# Altium PCB pcb.PcbDoc
Units mil, origin at the board's own origin, x right, y up, seen from the top; angles counter-clockwise.
Board outline 6000 x 4000 mil, 2 copper layers (Top Layer, Bottom Layer); 30 components, 39 nets, 195 pads, 11 vias.
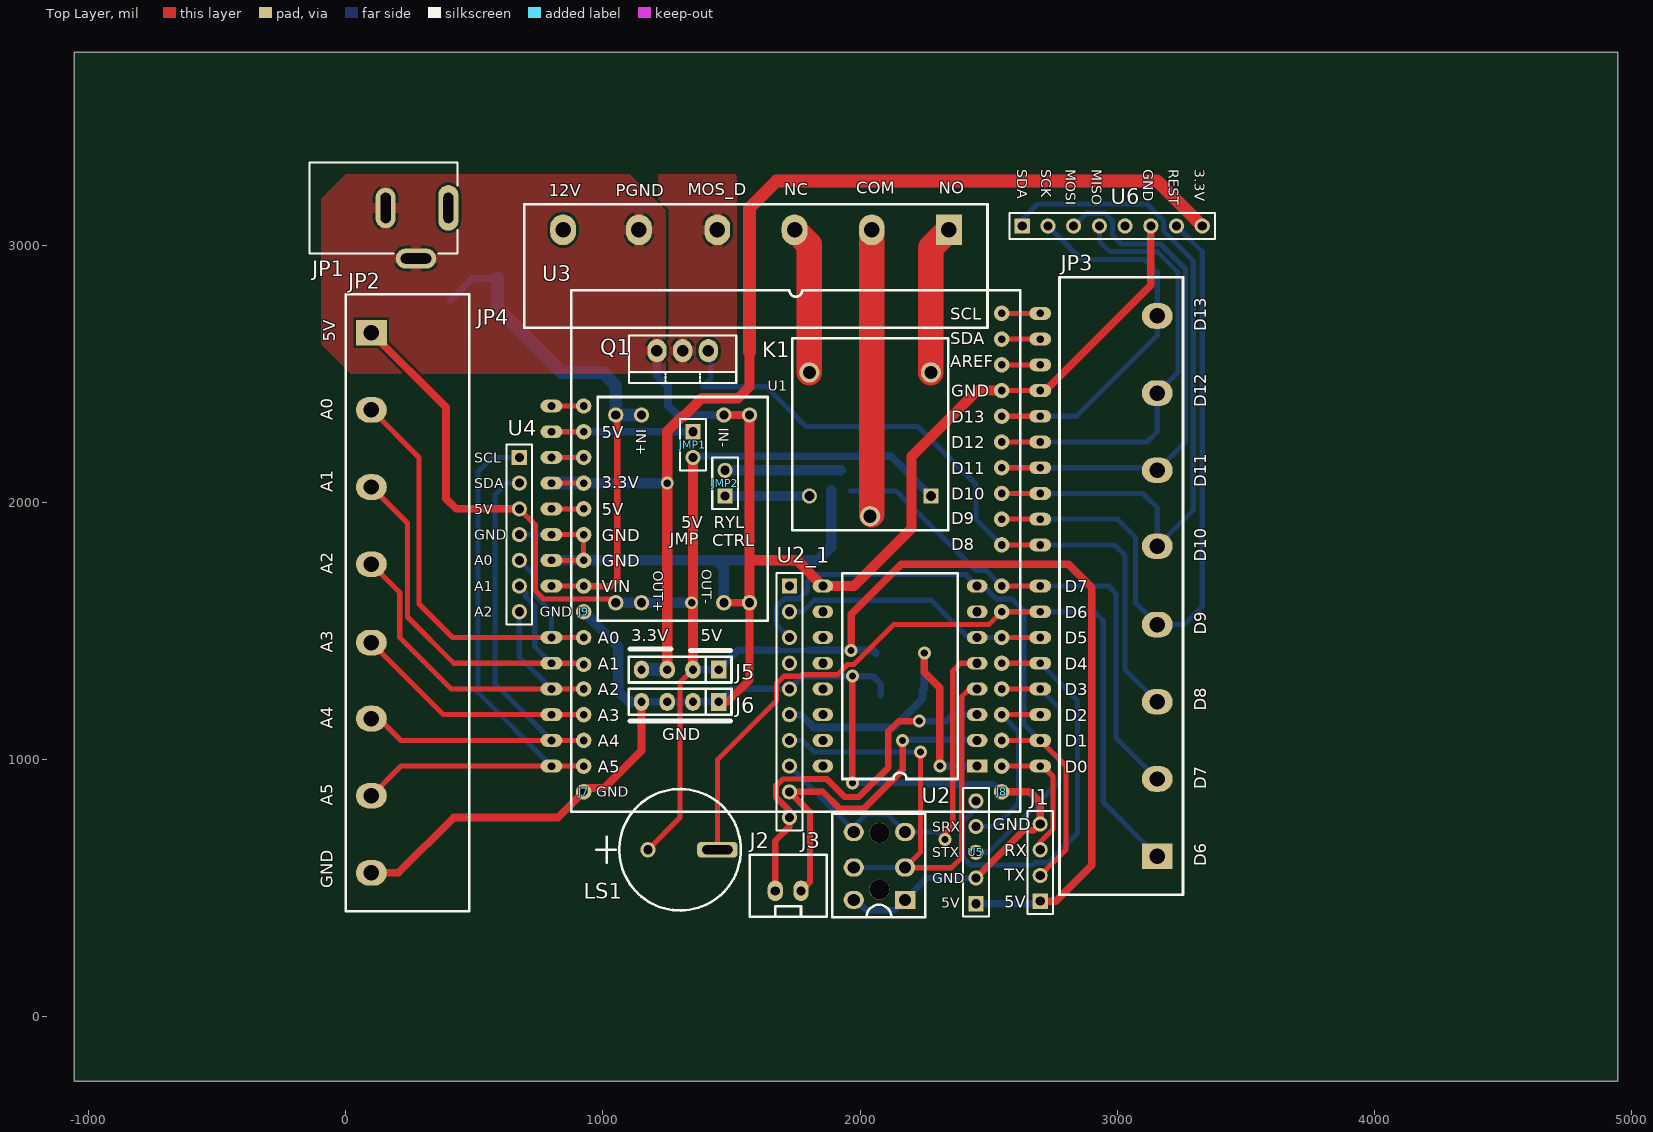
[diagram p0: Top Layer view]
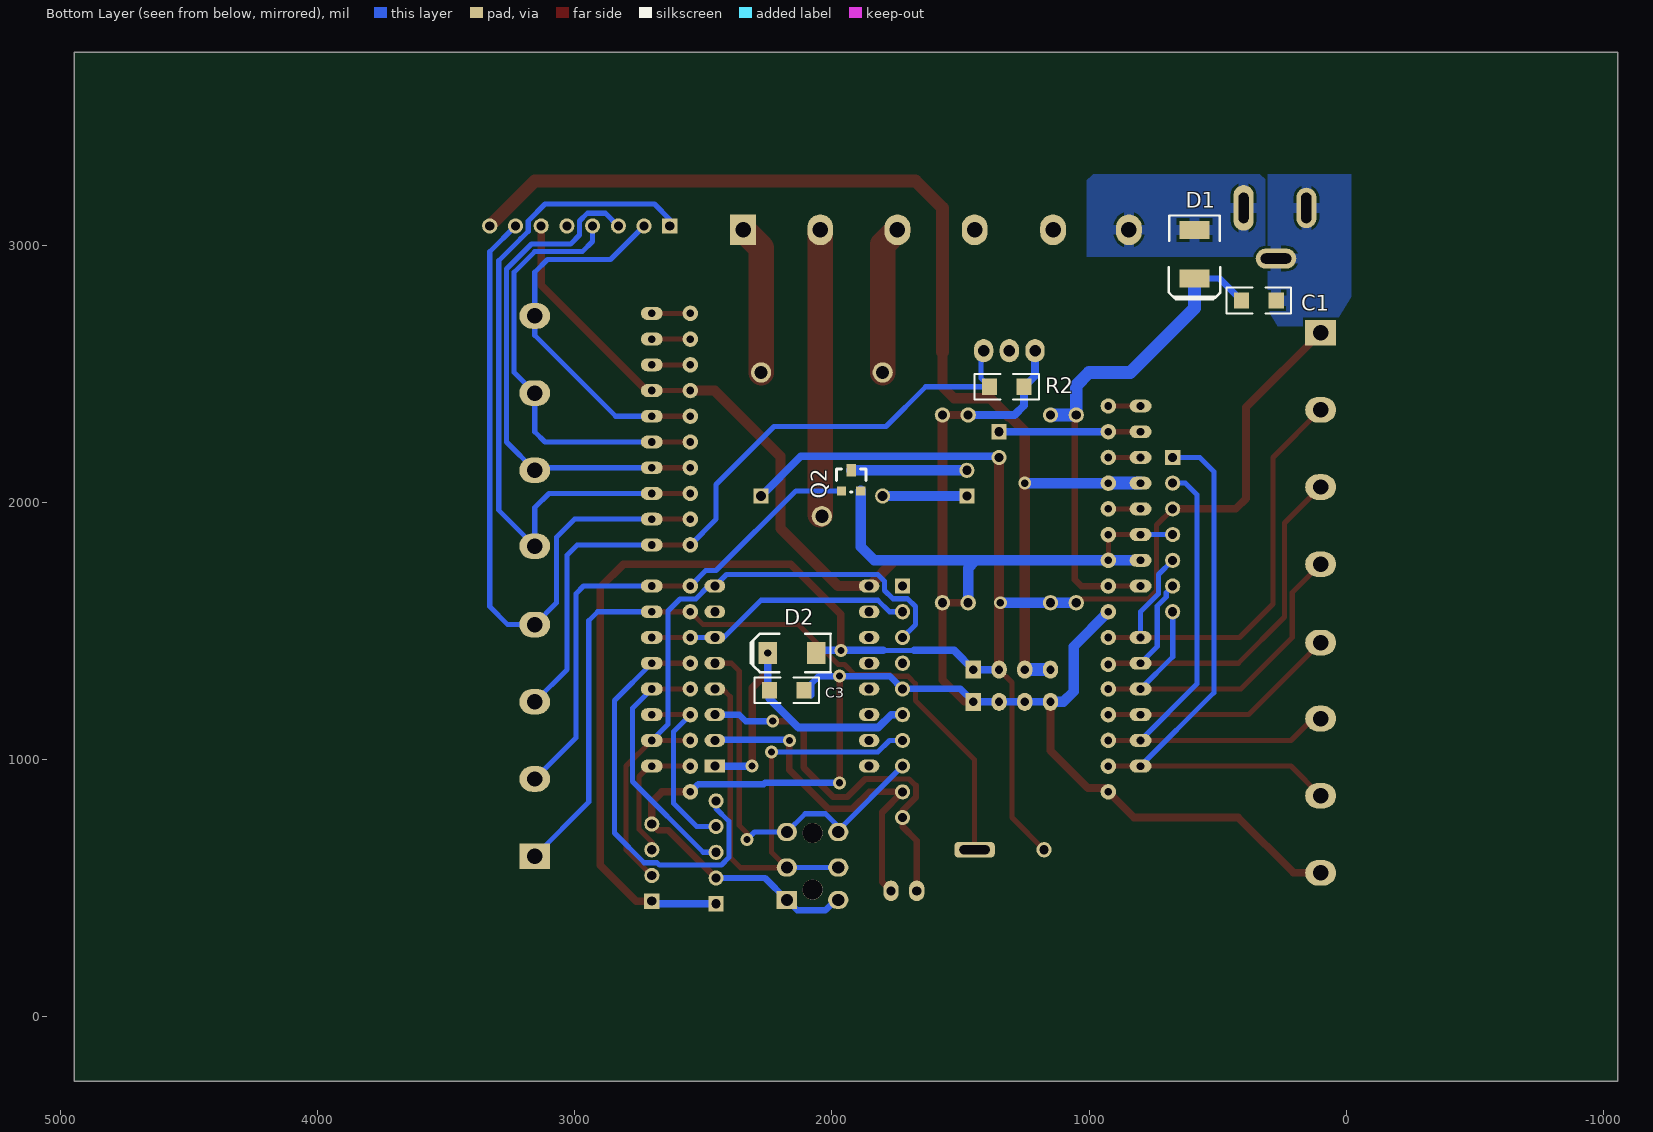
[diagram p1: Bottom Layer view, seen from below]

## Layer stack, top to bottom
Top Solder: solder mask 0.4, Solder Resist, Dk 3.5
Top Layer: signal copper 1.4
Dielectric 1: dielectric 12.6, FR-4, Dk 4.8
Bottom Layer: signal copper 1.4
Bottom Solder: solder mask 0.4, Solder Resist, Dk 3.5

## Board outline
-1055,-250 4945,-250 4945,3750 -1055,3750

## Design rules (kind name [scope] priority, off if disabled: settings)
Clearance Clearance_AC [(InNet('COM') OR InNet('NO') OR InNet('NC'))] p1: gap=30
Clearance [All] p2: gap=10
ComponentClearance ComponentClearance_1 [(InComponent('U3') OR InComponent('U1'))] p1: gap=0 collisioncheckmode=3 verticalgap=0 showdistances=TRUE
ComponentClearance [All] p2: gap=1 collisioncheckmode=3 verticalgap=1 showdistances=TRUE
HoleSize [All] p1: absolutevalues=TRUE maxlimit=200 minlimit=1 maxpercent=80.000 minpercent=20.000
PlaneConnect [All] p1: planeconnectstyle=Relief reliefexpansion=40 reliefentries=4 reliefconductorwidth=60 reliefairgap=20
PolygonConnect [All] p1: connectstyle=Relief reliefconductorwidth=40 reliefentries=4 polygonreliefangle="90 Angle" airgapwidth=10
RoutingVias [All] p1: holewidth=28 width=50 viastyle="Through Hole" minholewidth=28 minwidth=50 maxholewidth=28 maxwidth=50
SilkToSilkClearance [All] p1: silktosilkclearance=1
SilkToSolderMaskClearance [IsPad] p1: minsilkscreentomaskgap=5 clearancetoexposedcopper=TRUE
SolderMaskExpansion [All] p1: expansion=4
Width [All] p1: maxlimit=196.85 minlimit=10 preferedwidth=10
24 further rules are at their usual default settings.

## Components (designator, comment, footprint, x,y, rotation, side; value= is the part's Value field where it differs from the comment)
C1 "Cap Semi" 1206 340,2785 r0 bottom
C3 "Cap Semi" 1206 2175,1270 r0 bottom
D1 "SS24" SMB 590,2965 r270 bottom
D2 "M7" SMA 2155,1415 r0 bottom
J1 "4 HEADER" HDR1X4 2700,450 r90 top
J2 "SPK" DG1282 1570,130 r0 top
J3 "earphone_jack" PHONE-JACK 2175,455 r180 top
J5 "CON4" SIP4 1300,1350 r180 top
J6 "CON4" SIP4 1300,1225 r180 top
J7 "CON1" "ONE PIN" 925,875 r0 top
J8 "CON1" "ONE PIN" 2550,875 r0 top
J9 "CON1" "ONE PIN" 925,1575 r0 top
JMP1 "JUMPER" HDR1X2 1350,2275 r270 top
JMP2 "JUMPER" HDR1X2 1475,2025 r90 top
JP1 "PWR2.5" KLD-0202_new -140,3145 r0 top
JP2 "8 HEADER" "POWER CONN8" 100,2660 r270 top
JP3 "8 HEADER" "POWER CONN8" 3155,625 r90 top
JP4 "CON6" "POWER CONN6" 2345,3060 r180 top
K1 "RELAY-SPDT" RELAY_SPDT 2275,2025 r180 top
LS1 "Buzzer" BUZZ 1175,650 r0 top
Q1 "IRF510" TO-220 1310,2590 r180 top
Q2 "PDTC143ET" SOT23 1925,2085 r180 bottom
R2 "10k" 1206 1320,2450 r180 bottom
U1 "BuckConverter" BUCKCONVERTER 1570,2340 r270 top
U2 "MP3" MP3 2455,975 r180 top
U2_1 "SingleMP3" HDR1X10 1725,1675 r270 top
U3 "Uno_part" UNO 800,975 r0 top
U4 "ADDR_SET" HDR1X7 675,2175 r270 top
U5 "WireLess433" HDR1X5 2450,440 r90 top
U6 "RC522" HDR1X8 2630,3075 r0 top

## Footprints (in the part's own frame and the unit in brackets; to place one, negate y for a bottom-side part, rotate by r counter-clockwise, add the part's x,y. Pads: shape width x height; smd on the part's side, far side on the other; paste and mask are expansions set on the pad)
1206 [mm]
  rect 1.5x1.6 smd: 1(-1.71,0) 2(1.71,0)
  silkscreen extent -3.17,-1.27 3.17,1.27
BUCKCONVERTER [mil]
  round 60 hole 35.43: 1(0,0) 1(0,-100) 2(0,-420) 2(0,-520) 3(730,-100) 3(730,0) 4(730,-520) 4(730,-420)
  silkscreen extent -70,-590 800,70
BUZZ [mm] "6~8mm"
  round 1.5 hole 0.9: 1(0,0)
  rrect50% 4x1.524 hole 0.9 slot 3 at 0 deg: 2(6.858,0)
  silkscreen extent -5.08,-6 9.18,6
DG1282 [mil]
  oval 60x80 hole 35.43: 1(100,360) 2(200,360)
  silkscreen extent 0,260 300,500
HDR1X2 [mm] "Connector; Header; 2 Position"
  rect 1.5x1.5 hole 0.9: 1(0,0)
  round 1.5 hole 0.9: 2(2.54,0)
  silkscreen extent -1.27,-1.27 3.81,1.27
HDR1X4 [mm] "Connector; Header; 4 Position"
  rect 1.5x1.5 hole 0.9: 1(0,0)
  round 1.5 hole 0.9: 2(2.54,0) 3(5.08,0) 4(7.62,0)
  silkscreen extent -1.27,-1.27 8.89,1.27
HDR1X5 [mm] "Connector; Header; 5 Position"
  rect 1.5x1.5 hole 0.9: 1(0,0)
  round 1.5 hole 0.9: 2(2.54,0) 3(5.08,0) 4(7.62,0) 5(10.16,0)
  silkscreen extent -1.27,-1.27 11.43,1.27
HDR1X7 [mm] "Connector; Header; 7 Position"
  rect 1.5x1.5 hole 0.9: 1(0,0)
  round 1.5 hole 0.9: 2(2.54,0) 3(5.08,0) 4(7.62,0) 5(10.16,0) 6(12.7,0) 7(15.24,0)
  silkscreen extent -1.27,-1.27 16.51,1.27
HDR1X8 [mm] "Connector; Header; 8 Position"
  rect 1.5x1.5 hole 0.9: 1(0,0)
  round 1.5 hole 0.9: 2(2.54,0) 3(5.08,0) 4(7.62,0) 5(10.16,0) 6(12.7,0) 7(15.24,0) 8(17.78,0)
  silkscreen extent -1.27,-1.27 19.05,1.27
HDR1X10 [mm] "Connector; Header; 10 Position"
  rect 1.5x1.5 hole 0.9: 1(0,0)
  round 1.5 hole 0.9: 2(2.54,0) 3(5.08,0) 4(7.62,0) 5(10.16,0) 6(12.7,0) 7(15.24,0) 8(17.78,0) 9(20.32,0) 10(22.86,0)
  silkscreen extent -1.27,-1.27 24.13,1.27
KLD-0202_new [mm] "DC Power Jack, 2.5mm, KLD Series, PCB Mount"
  oval 2x4.5 hole 1 slot 3 at 90 deg: 1(13.7,0)
  oval 2x4 hole 1 slot 3 at 90 deg: 2(7.5,0)
  oval 4x2 hole 1 slot 3 at 0 deg: 3(10.5,-5)
  silkscreen extent 0,-4.5 14.6,4.5
MP3 [mil]
  rect 80x50 hole 35.43: 1(0,0)
  oval 80x50 hole 35.43: 2(0,-100) 3(0,-200) 4(0,-300) 5(0,-400) 6(0,-500) 7(0,-600) 8(0,-700) 9(600,-700) 10(600,-600) 11(600,-500) 12(600,-400) 13(600,-300) 14(600,-200) 15(600,-100) 16(600,0)
  silkscreen extent 75,-750 525,50
"ONE PIN" [mil] "D0.9mm"
  round 60 hole 30: 1(0,0)
PHONE-JACK [mm]
  round 2 hole 2: 0(2.54,-1.016) 0(2.54,-6.604)
  rect 2x1.8 hole 1.2: 1(0,0)
  oval 2x1.8 hole 1.2: 1(5.08,0) 2(0,-3.2) 2(5.08,-3.2) 3(0,-6.7) 3(5.08,-6.7)
  silkscreen extent -2,-8.5 7.2,1.7
"POWER CONN6" [mil]
  rect 100x120 hole 60: 1(0,0)
  oval 100x120 hole 60: 2(300,0) 3(600,0) 4(900,0) 5(1205,0) 6(1500,0)
  silkscreen extent -150,-100 1650,380
"POWER CONN8" [mil]
  rect 100x120 hole 60: 1(0,0)
  oval 100x120 hole 60: 2(300,0) 3(600,0) 4(900,0) 5(1205,0) 6(1500,0) 7(1800,0) 8(2100,0)
  silkscreen extent -150,-100 2250,380
RELAY_SPDT [mm]
  round 2 hole 1.3: 1(6,2) 2(12,-12.2) 3(0,-12.2)
  round 1.5 hole 1: 4(12,0)
  rect 1.5x1.5 hole 1: 5(0,0)
  silkscreen extent -1.7,-15.6 13.7,3.4
SIP4 [mil]
  rect 60x70 hole 32: 1(-150,0)
  oval 60x70 hole 32: 2(-50,0) 3(50,0) 4(150,0)
  silkscreen extent -200,-50 200,50
SMA [mm]
  rect 1.8x2.2 smd: A(-2.4,0) K(2.4,0)
  silkscreen extent -3.81,-1.91 4.06,1.91
SMB [mm]
  rect 1.8x3 smd: A(-2.4,0) K(2.4,0)
  silkscreen extent -3.81,-2.54 4.44,2.54
SOT23 [mil]
  rect 36x36 smd: B(-37.5,-40) E(37.5,-40)
  rect 36x50 smd: C(0.5,40)
  silkscreen extent -58,-45 58,45
TO-220 [mil]
  oval 75x90 hole 45: 1(-100,0) 2(0,0) 3(100,0)
  silkscreen extent -208,-58 208,125
UNO [mil]
  oval 85x50 hole 30: 1(0,1400) 2(0,1300) 3(0,1200) 4(0,1100) 5(0,1000) 6(0,900) 7(0,800) 8(0,700) 9(0,500) 10(0,400) 11(0,300) 12(0,200) 13(0,100) 14(0,0) 15(1900,0) 16(1900,100) 17(1900,200) 18(1900,300) 19(1900,400) 20(1900,500) 21(1900,600) 22(1900,700) 23(1900,860) 24(1900,960) 25(1900,1060) 26(1900,1160) 27(1900,1260) 28(1900,1360) 29(1900,1460) 30(1900,1560) 31(1900,1660) 32(1900,1760)
  round 60 hole 30: 1(125,1400) 2(125,1300) 3(125,1200) 4(125,1100) 5(125,1000) 6(125,900) 7(125,800) 8(125,700) 9(125,500) 10(125,395) 11(125,300) 12(125,200) 13(125,100) 14(125,0) 15(1750,0) 16(1750,100) 17(1750,200) 18(1750,300) 19(1750,400) 20(1750,500) 21(1750,600) 22(1750,700) 23(1750,860) 24(1750,960) 25(1750,1060) 26(1750,1160) 27(1750,1260) 28(1750,1360) 29(1750,1460) 30(1750,1560) 31(1750,1660) 32(1750,1760)
  Top Layer lines w20: 0,0 125,0 ; 0,100 125,100 ; 0,200 125,200 ; 0,300 125,300 ; 0,400 120,400 ; 0,500 125,500 ; 0,700 125,700 ; 0,800 125,800 ; 0,900 125,900 ; 0,1000 125,1000 ; 0,1100 125,1100 ; 0,1200 125,1200 ; 0,1300 125,1300 ; 0,1400 125,1400 ; 1750,0 1900,0 ; 1750,100 1900,100 ; 1750,200 1900,200 ; 1750,300 1900,300 ; 1750,400 1900,400 ; 1750,500 1900,500 ; 1750,600 1900,600 ; 1750,700 1900,700 ; 1750,860 1890,860 ; 1750,960 1900,960 ; 1750,1060 1900,1060 ; 1750,1160 1900,1160 ; 1750,1260 1900,1260 ; 1750,1360 1900,1360 ; 1750,1460 1900,1460 ; 1750,1560 1900,1560 ; 1750,1660 1900,1660 ; 1750,1760 1900,1760
  silkscreen extent 78,-177 1822,1850

## Part data
C1 C3: "Capacitor (Semiconductor SIM Model)"
D1 D2: library part "Diode 1N4001", "1 Amp General Purpose Rectifier"
J1: "4 Pin Header"
J2: library part CON2
J3: library part "Header 3", "Header, 3-Pin"
J5 J6 JP4: "Connector"
JP1: "Low Voltage Power Supply Connector"
JP2 JP3: "8 Pin Header"
LS1: "Magnetic Transducer Buzzer"
Q1: "HEXFET N-Channel Power MOSFET"
Q2: "NPN Resistor-equipped Transistor"
R2: library part RES1

## Via types
v1: diameter 50, hole 28, Top Layer to Bottom Layer, 11 vias

## Nets (pads, with @x,y where several pads share a name; then routed paths per layer and width w, separated by ;. In a path a pad name is that pad's centre, name@x,y a point inside that pad or via, vN(x,y) a via of type N, cw(c..) or ccw(c..) an arc to the next point about the centre after c; other vN are vias at no path point)
3.3V: J5.3 J5.4 U3.4 U6.8 | length 4439.3
  Top Layer w40: J5.3 v1(1250,2075) 1250,2276.48 1308.05,2334.53 1314.53,2334.53 1385,2405 1525,2405 1570,2450 1570,2585
  Top Layer w50: 1570,2585 1570,3145 1675,3250 3155,3250 U6.8
  Bottom Layer w40: U3.4@925,2075 v1(1250,2075)
  Bottom Layer w50: U3.4@800,2075 U3.4@925,2075 ; J5.4 J5.3
5V: D2.A J1.1 J5.1 J5.2 JMP1.2 JP2.1 K1.5 LS1.1 U1.4 U4.3 U5.1 | length 8166.3
  Top Layer w20: U4.3 737.5,1912.5 737.5,1656.36 768.86,1625 1035,1625 U1.4@1050,1610 ; LS1.1 1300,775 1300,1300 J5.2
  Top Layer w30: JP2.1 390,2370 390,2015 430,1975 U4.3 ; v1(1345,1610) v1@1350,1605 ; JMP1.2 JMP1.2@1350,2180 ; v1(1965,1425) 1965,1565 2160,1760 2810,1760 2900,1670 2900,590 2760,450 J1.1
  Top Layer w40: J5.2 v1@1350,1605 ; v1@1350,1615 JMP1.2
  Bottom Layer w20: 1680,1425 1800,1425
  Bottom Layer w30: v1(1345,1610) v1@1350,1615 ; J5.2 J5.1 1525,1425 1680,1425 ; JMP1.2 1354.53,2179.53 2120.47,2179.53 K1.5 ; 1800,1425 2050.51,1425 D2.A ; U5.1 2690,440 J1.1
  Bottom Layer w40: U1.4@1050,1610 1150,1610 v1(1345,1610)
12V: D1.A JP1.1 JP4.6 | length 0.7
  Bottom Layer w50: JP4.6@844.49,3059.49 JP4.6
A0: JP2.2 U3.9 U4.5 | length 1752.3
  Top Layer w20: JP2.2 285,2175 285,1605 415,1475 U3.9@800,1475
  Bottom Layer w20: U4.5 730,1720 730,1645 800,1575 U3.9@800,1475
A1: JP2.3 U3.10 U4.6 | length 1564.3
  Top Layer w20: JP2.3 240,1920 240,1555 420,1375 U3.10@800,1375
  Bottom Layer w20: JP2.3 JP2.3@115,2060 ; U4.6 700,1650 700,1632.57 735,1597.57 735,1440 U3.10@800,1375
A2: JP2.4 U3.11 U4.7 | length 1376.4
  Top Layer w20: JP2.4 210,1650 210,1475 410,1275 U3.11@800,1275
  Bottom Layer w20: U4.7@660,1560 U4.7 675,1400 U3.11@800,1275
A3: JP2.5 U3.12 | length 831
  Top Layer w20: JP2.5 380,1175 U3.12@800,1175
  Bottom Layer w20: U3.12@785,1175 U3.12@800,1175
A4: JP2.6 U3.13 U4.2 | length 1895
  Top Layer w20: JP2.6 130,1160 215,1075 U3.13@800,1075
  Bottom Layer w20: U4.2 625,2075 580,2030 580,1295 U3.13@800,1075
A5: JP2.7 U3.14 U4.1 | length 2193.5
  Top Layer w20: JP2.7 215,975 U3.14@800,975
  Bottom Layer w20: U4.1 570,2175 515,2120 515,1260 U3.14@800,975
COM: JP4.2 K1.1 | length 1107.5
  Top Layer w100: K1.1@2045,1952.48 JP4.2
D0: J1.3 U3.15 | length 371.3
  Top Layer w20: J1.3 2700,679.96 2749.53,729.48 2749.53,934.53 2709.06,975 U3.15@2700,975
D1: J1.2 U2.8 U2_1.3 U3.16 | length 2371.3
  Top Layer w20: J1.2 2800,650 2800,975 U3.16@2700,1075
  Bottom Layer w20: U2_1.3 1675,1525 1675,1595.04 1705.43,1625.47 1762.81,1625.47 1795,1657.66 1795,1693.64 1821.36,1720 2410,1720 U2.8 2479.29,1675 2529.29,1625 2590,1625 2637.5,1577.5 2637.5,1137.5 U3.16@2700,1075
D2: U3.17 U5.4 | length 574.2
  Bottom Layer w20: U5.4 2525,740 2615,830 2615,1110 U3.17@2550,1175
D3: U3.18 U5.3 | length 830
  Bottom Layer w20: U5.3 2500,640 2775,915 2775,1200 U3.18@2700,1275
D4: U3.19 U5.5 | length 1469.2
  Bottom Layer w20: U5.5 2450,810.04 2400.47,760.52 2400.47,619.48 2429.48,590.47 2670.43,590.47 2679.48,599.53 2729.53,599.53 2845,715 2845,1230 U3.19@2700,1375
D5: U2.6 U2_1.2 U3.20 | length 903.7
  Bottom Layer w20: U2_1.2 1776.36,1575 1821.36,1620 2275,1620 2420,1475 U2.6 U3.20@2550,1475
D6: JP3.1 LS1.2 U3.21 | length 2992.8
  Top Layer w20: LS1.2 1445,1000 1675.47,1230.47 1675.47,1295.51 1704.49,1324.53 1769.53,1324.53 1775,1330 1911.36,1330 1951.36,1370 1975,1370 2130,1525 2500,1525 U3.21@2550,1575
  Bottom Layer w20: U3.21@2700,1575 2910,1575 2945,1540 2945,835 JP3.1
D7: JP3.2 Q2.B U3.22 | length 1834.5
  Bottom Layer w20: Q2.B 2140,2045 2450,1735 2490,1735 U3.22@2550,1675 ; U3.22@2700,1675 2965,1675 2995,1645 2995,1085 JP3.2
D8: JP3.3 Q1.1 R2.1 U3.23 | length 2622.5
  Bottom Layer w20: Q1.1 1420,2580 1420,2482.68 R2.1 1635,2450 1790,2295 2225,2295 2450,2070 2450,1935 U3.23@2550,1835 ; U3.23@2700,1835 2990,1835 3030,1795 3030,1350 JP3.3
D9: JP3.4 U3.24 U6.7 | length 2499.6
  Bottom Layer w20: U3.24@2700,1935 3000,1935 3070,1865 3070,1610 JP3.4 3260,1525 3330,1595 3330,2975 U6.7
D10: JP3.5 U3.25 U6.1 | length 2625.2
  Bottom Layer w20: U6.1 2630,3100 2690,3160 3115.04,3160 3180.47,3094.57 3180.47,3054.48 3209.48,3025.47 ; U3.25@2700,2035 3100,2035 3155,1980 JP3.5 3295,1970 3295,2940 3209.53,3025.47
D11: JP3.6 U3.26 U6.3 | length 1864.6
  Bottom Layer w20: U3.26@2700,2135 3145,2135 JP3.6 3265,2235 3265,2907.43 3167.43,3005 3015.43,3005 2980.47,3039.96 2980.47,3094.57 2950.52,3124.53 2880.47,3124.53 2830.94,3075 U6.3
D12: JP3.7 U3.27 U6.4 | length 1539.4
  Bottom Layer w20: U3.27@2700,2235 3115,2235 3155,2275 JP3.7 3235,2505 3235,2895 3155,2975 2970,2975 2930,3015 U6.4
D13: JP3.8 U3.28 U6.2 | length 1330
  Bottom Layer w20: U3.28@2700,2335 2840,2335 3155,2650 JP3.8 3155,2895 3105,2945 2860,2945 U6.2
DAC-L: J3.3 U2.5 U2_1.8 | length 1566.8
  Top Layer w20: v1(2330,690) 2330,713.78 2360,743.78 2360,1345 2390,1375 U2.5
  Bottom Layer w20: U2_1.8 J3.3@1975,725 ; J3.3@1975,718.78 1975,740 2025,790 2103.78,790 2175,718.78 2301.22,718.78 v1(2330,690)
DAC-R: J3.2 U2.4 U2_1.7 | length 2126.5
  Top Layer w20: J3.2@2175,580.98 2234.37,640.35 2234.37,771.11 2235,771.74 v1(2235,1030) ; J3.2@2185,580 2355,580 2395,620 2395,1245 2425,1275 U2.4
  Bottom Layer w20: U2_1.7 1776.36,1075 1821.36,1030 v1(2235,1030) ; J3.2@1975,580.98 J3.2@2175,580.98
GND: C1.1 C3.1 J1.4 J3.1 J6.1 J6.2 J6.3 J6.4 J7.1 J8.1 J9.1 JP1.2 JP1.3 JP2.8 JP4.5 Q1.3 Q2.E R2.2 U1.1 U1.3 U2.9 U2_1.5 U3.6 U3.7 U3.29 U4.4 U5.2 U6.6 | length 10986.8
  Top Layer w20: U3.7@925,1775 U3.6@925,1875
  Top Layer w25: v1(1970,910) v1(1970,1325) ; U5.2 2635,725 2675,725 J1.4
  Top Layer w30: JP2.8 205,560 420,775 825,775 J7.1 940,890 1004.5,890 1150,1035.5 J6.4 ; J6.1 1485,1225 1570,1310 1570,1610 U1.3@1470,1610 ; U1.1@1470,2340 U1.1@1570,2340 ; J8.1 2660,875 2700,835 J1.4 ; U3.29@2700,2435 2720,2435 3130,2845 U6.6
  Top Layer w40: U1.3@1570,1610 1570,1775 ; U1.1@1570,2340 1570,1775 ; U3.29@2550,2435 2455,2435 2200,2180 2200,1900 1975,1675 U2.9 1755,1775 1570,1775
  Bottom Layer w20: U4.4 U3.6@800,1875
  Bottom Layer w25: J6.1 1500,1275 U2_1.5 1775,1325 v1(1970,1325) 2050,1325 2080,1295 C3.1@2080,1250 ; v1(1970,910) 2260,910 2265,905 2520,905 J8.1 ; J3.1@1975,455 1985,455 2025,415 2135,415 2175,455 2260,540 U5.2
  Bottom Layer w30: J6.4 J6.3 J6.2 J6.1 ; Q1.3 1210,2492.68 R2.2 1252.68,2377.32 1290,2340 U1.1@1470,2340
  Bottom Layer w40: U3.7@800,1775 1440,1775 ; J9.1 1060,1440 1060,1265 1100,1225 J6.4 ; U1.3@1470,1610 1470,1745 1440,1775 ; Q2.E 1887.5,1827.5 1835,1775 1440,1775
NC: JP4.3 K1.2 | length 578.5
  Top Layer w100: JP4.3 1802.56,3002.44 K1.2
NetJMP1_1: JMP1.1 U3.2 | length 425
  Bottom Layer w30: U3.2@925,2275 JMP1.1
NetJMP2_1: JMP2.1 K1.4 | length 327.6
  Bottom Layer w40: JMP2.1 K1.4
NetJMP2_2: JMP2.2 Q2.C | length 449.5
  Bottom Layer w40: JMP2.2 Q2.C
NetJP4_4: JP4.4 Q1.2
NO: JP4.1 K1.3 | length 583.7
  Top Layer w100: K1.3 2275,2990 JP4.1
SCL: U3.32
SDA: U3.31
SPK+: J2.2 U2.2 U2_1.9 | length 1365.2
  Top Layer w25: J2.2 1805,525 1805,795 U2_1.9 1855,875 1920,810 2015,810 2165,960 v1(2165,1075)
  Bottom Layer w25: v1(2165,1075) 2167.5,1077.5 U2.2@2452.5,1077.5
SPK-: J2.1 U2.3 U2_1.10 | length 1489.1
  Top Layer w20: 1672.97,897.97 1700,925 1775,925
  Top Layer w25: J2.1 1670,685 1725,740 U2_1.10 1725,801.42 1672.97,853.45 1672.97,897.97 ; 1775,925 1870,925 1940,855 1995,855 2110,970 2110,1110 2150,1150 v1(2230,1150)
  Bottom Layer w25: v1(2230,1150) 2335,1150 2360,1175 U2.3
VCC_MP3: C3.2 D2.K U2.1 U2_1.6 | length 1375.3
  Top Layer w30: v1(2249.49,1415) 2249.49,1340 2310,1279.49 v1(2310,975)
  Bottom Layer w30: U2_1.6 1769.29,1175 1819.29,1125 2130,1125 2242.32,1237.32 C3.2 2249.49,1277.17 2249.49,1340 v1(2249.49,1415) ; v1(2310,975) U2.1
VIN: C1.2 D1.K U1.2 U3.8 | length 1915.3
  Top Layer w25: U3.8@925,1675 1030,1675 1055,1700 1055,2335 U1.2@1050,2340
  Bottom Layer w25: C1.2 492.83,2870.51 D1.K
  Bottom Layer w50: D1.K 590,2755 840,2505 1000,2505 1050,2455 1050,2340 U1.2@1150,2340
pads on no net: J3.0 U2.7 U2.10 U2.11 U2.12 U2.13 U2.14 U2.15 U2.16 U2_1.1 U2_1.4 U3.1 U3.3 U3.5 U3.30 U6.5

## Polygon pours and split planes (outlines as drawn)
NetJP4_4 on Top Layer "Top Layer-No Net" (solid, pour order 6): 1215,3275 1215,2510 1225,2500 1235,2510 1520,2510 1520,3270 1515,3275 1510,3275
GND on Top Layer "Top Layer-No Net" (solid, pour order 2): -95,3180 0,3275 1105,3275 1245,3135 1245,2500 20,2500 -95,2615
12V on Bottom Layer "Top Layer-No Net" (solid, pour order 12): 305,2955 1010,2955 1010,3252.14 988.96,3270.43 983.69,3275 357.61,3275 336.57,3275 305,3247.57
GND on Bottom Layer "Top Layer-No Net" (solid, pour order 8): -20,3275 -20,2798.86 39.09,2705.7 52.22,2685 239.34,2685 265.61,2685 305,2747.11 305,3275

## Silkscreen, mask and mechanical layers (free items; w line width, h text height)
Top Overlay:
  lines w20: 1105,1150 1495,1150 ; 1105,1430 1265,1430 ; 1340,1425 1495,1425
  text "SDA" at 2610,3295 h40 r270
  text "SCK" at 2705,3295 h40 r270
  text "MOSI" at 2800,3295 h40 r270
  text "MISO" at 2900,3295 h40 r270
  text "GND" at 3100,3295 h40 r270
  text "REST" at 3200,3295 h40 r270
  text "3.3V" at 3300,3295 h40 r270
  text "COM" at 1985,3200 h47.24
  text "NO" at 2305,3200 h47.24
  text "MOS_D" at 1330,3195 h47.24
  text "NC" at 1705,3195 h47.24
  text "12V" at 790,3190 h47.24
  text "PGND" at 1050,3190 h47.24
  text "D13" at 3345,2665 h47.24 r90
  text "5V" at -40,2625 h47.24 r90
  text "D12" at 3345,2370 h47.24 r90
  text "A0" at -50,2320 h47.24 r90
  text "SCL" at 500,2155 h40
  text "D11" at 3345,2060 h47.24 r90
  text "SDA" at 500,2055 h40
  text "A1" at -50,2040 h47.24 r90
  text "5V" at 500,1955 h40
  text "5V" at 1305,1900 h47.24
  text "RYL" at 1430,1900 h47.24
  text "GND" at 500,1855 h40
  text "JMP" at 1260,1835 h47.24
  text "CTRL" at 1425,1830 h47.24
  text "D10" at 3345,1770 h47.24 r90
  text "A0" at 500,1755 h40
  text "A2" at -50,1720 h47.24 r90
  text "A1" at 500,1655 h40
  text "A2" at 500,1555 h40
  text "GND" at 755,1555 h40
  text "D9" at 3345,1485 h47.24 r90
  text "3.3V" at 1110,1460 h47.24
  text "5V" at 1380,1460 h47.24
  text "A3" at -50,1415 h47.24 r90
  text "D8" at 3345,1190 h47.24 r90
  text "A4" at -50,1120 h47.24 r90
  text "GND" at 1230,1075 h47.24
  text "D7" at 3345,885 h47.24 r90
  text "GND" at 975,855 h40
  text "A5" at -50,820 h47.24 r90
  text "GND" at 2515,725 h47.24
  text "SRX" at 2280,720 h40
  text "RX" at 2560,625 h47.24
  text "STX" at 2280,620 h40
  text "D6" at 3345,585 h47.24 r90
  text "TX" at 2560,530 h47.24
  text "GND" at 2280,520 h40
  text "GND" at -50,500 h47.24 r90
  text "5V" at 2315,425 h40
  text "5V" at 2560,425 h47.24
Mechanical 1:
  lines w10: -150,380 3395,380 3395,3330 -150,3330 -150,380

## Dimensions
3395,380 to 3395,3330 on Top Overlay
-150,380 to 3395,380 on Top Overlay

## Text inside footprints (layer, text, board x,y; h text height)
U1: Top Overlay "OUT+" at 1195,1735 h40 r270; Top Overlay "OUT-" at 1385,1740 h40 r270; Top Overlay "IN-" at 1450,2290 h40 r270; Top Overlay "IN+" at 1130,2285 h40 r270
U3: Top Overlay "A5" at 980,950 h47.24; Top Overlay "5V" at 995,2250 h47.24; Top Overlay "3.3V" at 995,2055 h47.24; Top Overlay "5V" at 995,1950 h47.24; Top Overlay "GND" at 995,1850 h47.24; Top Overlay "GND" at 995,1750 h47.24; Top Overlay "VIN" at 995,1650 h47.24; Top Overlay "A0" at 980,1450 h47.24; Top Overlay "A1" at 980,1350 h47.24; Top Overlay "A2" at 980,1250 h47.24; Top Overlay "A4" at 980,1050 h47.24; Top Overlay "A3" at 980,1150 h47.24; Top Overlay "D0" at 2795,950 h47.24; Top Overlay "D1" at 2795,1050 h47.24; Top Overlay "D2" at 2795,1150 h47.24; Top Overlay "D3" at 2795,1250 h47.24; Top Overlay "D4" at 2795,1350 h47.24; Top Overlay "D5" at 2795,1450 h47.24; Top Overlay "D6" at 2795,1550 h47.24; Top Overlay "D7" at 2795,1650 h47.24; Top Overlay "D8" at 2355,1815 h47.24; Top Overlay "D9" at 2355,1915 h47.24; Top Overlay "D10" at 2355,2010 h47.24; Top Overlay "D11" at 2355,2110 h47.24; Top Overlay "D12" at 2355,2210 h47.24; Top Overlay "D13" at 2355,2310 h47.24; Top Overlay "GND" at 2355,2410 h47.24; Top Overlay "AREF" at 2350,2525 h47.24; Top Overlay "SDA" at 2350,2615 h47.24; Top Overlay "SCL" at 2350,2710 h47.24